# EAGLE board 4.17 build (EAGLE 7.2.0)
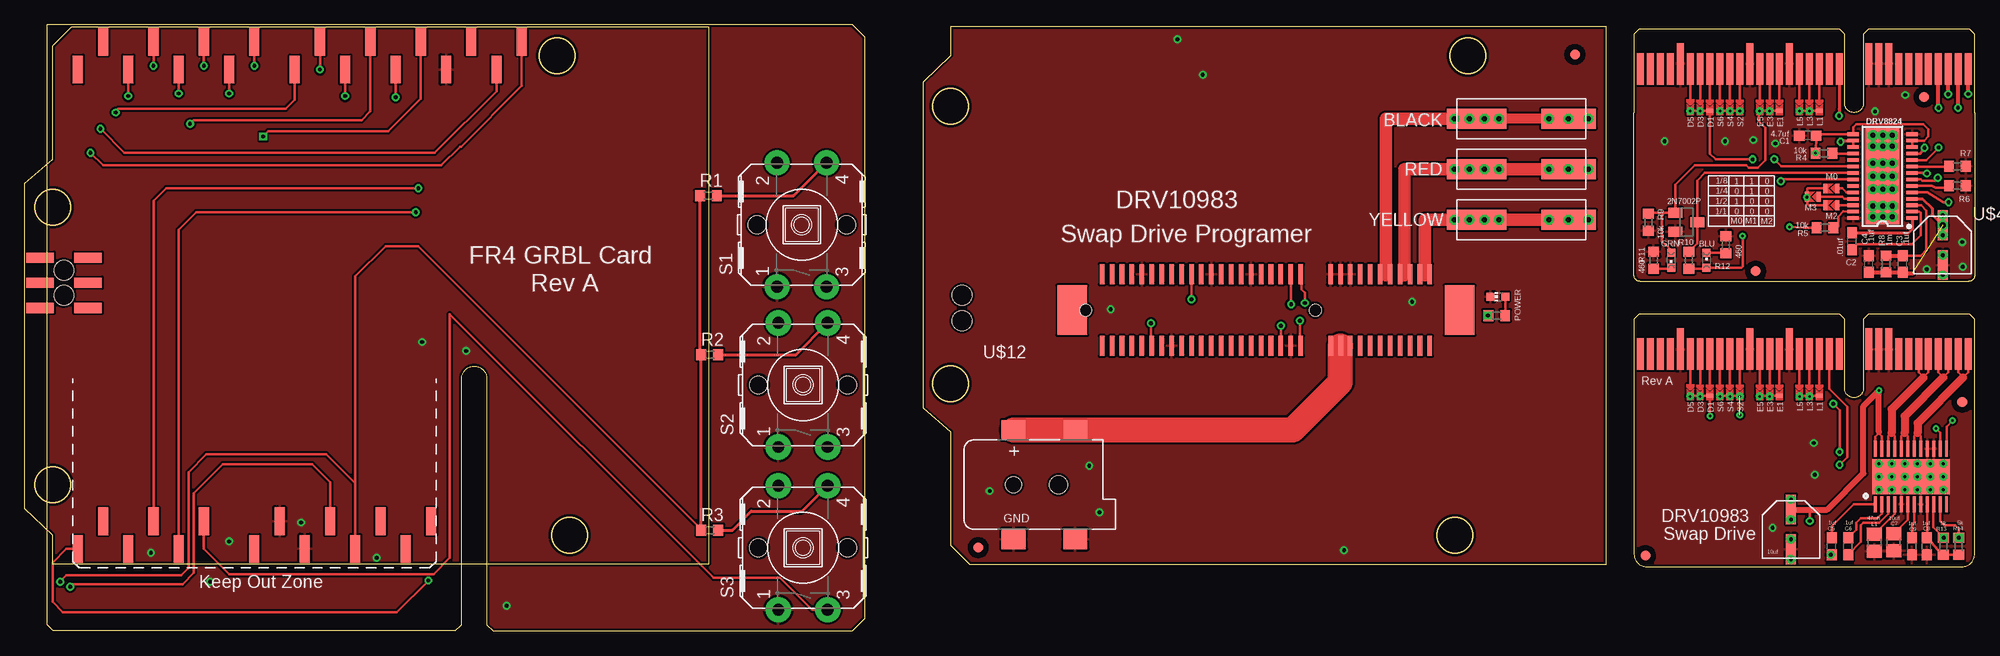
[diagram p0: board, top side]
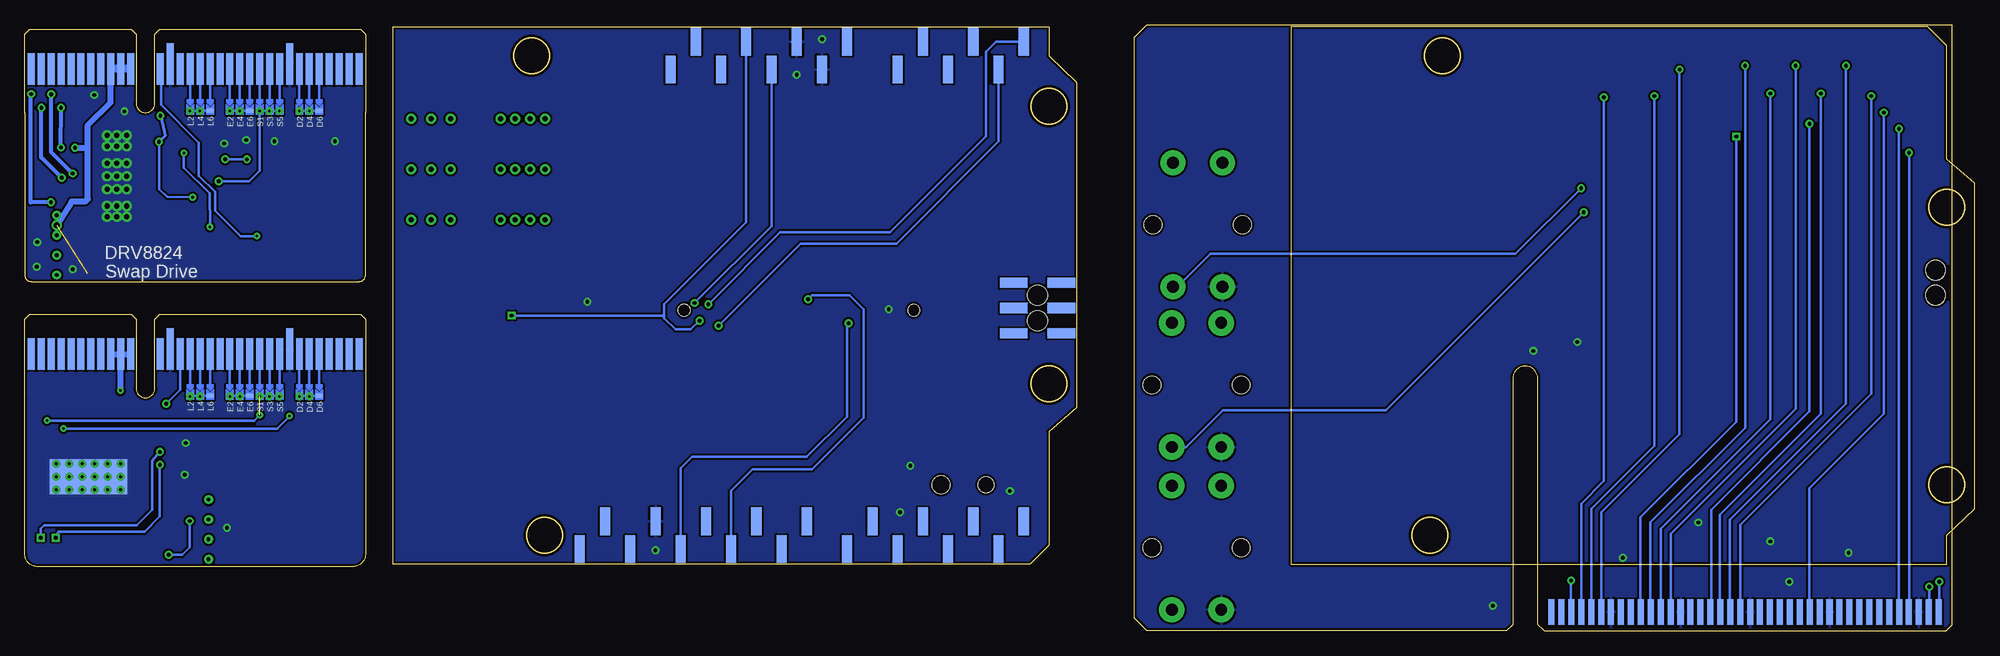
[diagram p1: board, bottom side, seen from below]

Size 196.34 x 61.02 mm. Coordinates in mm from the lower left corner, seen from the top.
Outline: 196.34,52.18 196.34,35.81 arc-90 195.71,35.18 162.68,35.18 arc-90 162.04,35.81 162.04,52.18
Outline: 162.04,23.48 162.04,7.75 arc90 163.31,6.48 195.07,6.48 arc90 196.34,7.75 196.34,23.48
Copper layers (1*16): Top 0.035mm / dielectric 1.5mm / Bottom 0.035mm
Design rules "default *": minimum track width 10mil, minimum drill 24mil, track to track 8mil, track to pad 8mil, pad to pad 8mil, via to via 8mil, smd to smd 8mil, copper to edge 10mil, drill to drill 8mil, minimum pad ring 10mil, minimum via ring 8mil, stop-mask expansion 4mil, vias tented up to drill 0mil, thermal gap 10mil

## Footprints (pad centres in the part's own frame; a part is rotated, then mirrored left to right if it is on the bottom)
SOT23 = smd 1 x 1.4: 1 -0.95,-1.1; 2 0.95,-1.1; 3 0,1.1
104188-0110 = smd 5.5 x 2: 1@1 0,0 | smd 6 x 2: 1@2 9.25,0 | drill 0.5: 1@3 -2,0; 1@4 0,0; 1@5 2,0; 1@6 7,0; 1@7 8.5,0; 1@9 10,0; 1@10 11.5,0
CHIPLED_0603 = smd 0.8 x 0.8: A 0,-0.75; C 0,0.75
C0603 = smd 1.1 x 1: 1 -0.85,0; 2 0.85,0
C0805 = smd 1.3 x 1.5: 1 -0.85,0; 2 0.85,0
DCJACK_2MM_SMT = smd 2.4 x 2: GND 0,-5.5; GNDBREAK 6.2,-5.5; PWR1 0,5.5; PWR2 6.2,5.5 | hole 1.6: 0,0 | hole 1.8: 4.5,0
HTSSOP-28 = smd 0.36 x 1.19: 1 -4.225,-2.97; 2 -3.575,-2.97; 3 -2.925,-2.97; 4 -2.275,-2.97; 5 -1.625,-2.97; 6 -0.975,-2.97; 7 -0.325,-2.97; 8 0.325,-2.97; 9 0.975,-2.97; 10 1.625,-2.97; 11 2.275,-2.97; 12 2.925,-2.97; 13 3.575,-2.97; 14 4.225,-2.97; 15 4.225,2.97; 16 3.575,2.97; 17 2.925,2.97; 18 2.275,2.97; 19 1.625,2.97; 20 0.975,2.97; 21 0.325,2.97; 22 -0.325,2.97; 23 -0.975,2.97; 24 -1.625,2.97; 25 -2.275,2.97; 26 -2.925,2.97; 27 -3.575,2.97; 28 -4.225,2.97 | drill 0.508: GND@10 -4.1,1; GND@11 -4.1,0; GND@12 -4.1,-1; GND@13 -3,-1; GND@14 -3,0; GND@15 -3,1; GND@16 -1.3,1; GND@17 -1.3,0; GND@18 -1.3,-1; GND@19 0,-1; GND@20 0,0; GND@21 0,1; GND@22 1.3,1; GND@23 1.3,0; GND@24 1.3,-1; GND@25 3,-1; GND@26 3,0; GND@27 3,1; GND@28 4.1,1; GND@29 4.1,0; GND@30 4.1,-1 | smd 9.7 x 3.4: GND@PAD 0,0
SELECTIVE_CONNECT = smd 0.4 x 1: P$1 0,0; P$2 1.2,0
ARDUINOR3_ICSP_SMT = smd 1.016 x 2.794 bottom: 3V 35.56,1.143; 5V 38.1,3.937; A0 50.8,3.937; A1 53.34,1.143; A2 55.88,3.937; A3 58.42,1.143; A4 60.96,3.937; A5 63.5,1.143; AREF 23.876,52.197; D0 63.5,49.403; D1 60.96,52.197; D2 58.42,49.403; D3 55.88,52.197; D4 53.34,49.403; D5 50.8,52.197; D6 48.26,49.403; D7 45.72,52.197; D8 41.656,49.403; D9 39.116,52.197; D10 36.576,49.403; D11 34.036,52.197; D12 31.496,49.403; D13 28.956,52.197; GND 26.416,49.403; GND@1 43.18,3.937; GND@2 40.64,1.143; IOREF 30.48,1.143; RESERVED 27.94,3.937; RESET 33.02,3.937; SCL 18.796,52.197; SDA 21.336,49.403; VIN 45.72,1.143 | smd 2.794 x 1.016 bottom: 5V_ICSP 67.31,30.48; GND@3 67.31,25.4; MISO 62.484,30.48; MOSI 67.31,27.94; RESET_ICSP 62.484,25.4; SCK 62.484,27.94 | hole 2: 64.897,29.21; 64.897,26.67
CHIP-LED0603 = smd 0.8 x 0.8: A 0,-0.75; C 0,0.75
R0603 = smd 1 x 1.1: 1 -0.85,0; 2 0.85,0
B3F-40XX-ROUND = drill 1.194 pad 2.54: 1 -6.248,2.489; 2 6.248,2.489; 3 -6.248,-2.489; 4 6.248,-2.489 | hole 1.803: 0,-4.496; 0,4.496
FR4_CARD_EDGE = smd 0.61 x 2.54 bottom: P$1 -19.5,1.91; P$2 -18.5,1.91; P$3 -17.5,1.91; P$4 -16.5,1.91; P$5 -15.5,1.91; P$6 -14.5,1.91; P$7 -13.5,1.91; P$8 -12.5,1.91; P$9 -11.5,1.91; P$10 -10.5,1.91; P$11 -9.5,1.91; P$12 -8.5,1.91; P$13 -7.5,1.91; P$14 -6.5,1.91; P$15 -5.5,1.91; P$16 -4.5,1.91; P$17 -3.5,1.91; P$18 -2.5,1.91; P$19 -1.5,1.91; P$20 -0.5,1.91; P$21 0.5,1.91; P$22 1.5,1.91; P$23 2.5,1.91; P$24 3.5,1.91; P$25 4.5,1.91; P$26 5.5,1.91; P$27 6.5,1.91; P$28 7.5,1.91; P$29 8.5,1.91; P$30 9.5,1.91; P$31 10.5,1.91; P$32 11.5,1.91; P$33 12.5,1.91; P$34 13.5,1.91; P$35 14.5,1.91; P$36 15.5,1.91; P$37 16.5,1.91; P$38 17.5,1.91; P$39 18.5,1.91; P$40 19.5,1.91
PCIE_64_SMART_BOARD = smd 0.7 x 4.2: GND@1 8.65,3.5; GND@2 9.65,3.5; GND@3 10.65,3.5; P$49 18.65,3.5; P$53 22.65,3.5; P$60 29.65,3.5 | smd 0.7 x 3.2 bottom: P$1 0.65,4; P$2 1.65,4; P$3 2.65,4; P$4 3.65,4; P$5 4.65,4; P$6 5.65,4; P$7 6.65,4; P$8 7.65,4; P$9 8.65,4; P$10 9.65,4; P$11 10.65,4; P$12 13.65,4; P$14 15.65,4; P$15 16.65,4; P$16 17.65,4; P$17 18.65,4; P$18 19.65,4; P$19 20.65,4; P$20 21.65,4; P$21 22.65,4; P$22 23.65,4; P$23 24.65,4; P$24 25.65,4; P$26 27.65,4; P$27 28.65,4; P$28 29.65,4; P$29 30.65,4; P$30 31.65,4; P$31 32.65,4; P$32 33.65,4 | smd 0.7 x 4.2 bottom: P$13 14.65,3.5; P$25 26.65,3.5 | smd 0.7 x 0.4 bottom: P$15@1 16.65,8.2; P$16@1 17.65,8.2; P$17@1 18.65,8.2; P$19@1 20.65,8.2; P$20@1 21.65,8.2; P$21@1 22.65,8.2; P$22@1 23.65,8.2; P$23@1 24.65,8.2; P$24@1 25.65,8.2; P$26@1 27.65,8.2; P$27@1 28.65,8.2; P$28@1 29.65,8.2 | smd 0.7 x 3.2: P$33 0.65,4; P$34 1.65,4; P$35 2.65,4; P$36 3.65,4; P$37 4.65,4; P$38 5.65,4; P$39 6.65,4; P$40 7.65,4; P$44 13.65,4; P$45 14.65,4; P$46 15.65,4; P$47 16.65,4; P$48 17.65,4; P$50 19.65,4; P$51 20.65,4; P$52 21.65,4; P$54 23.65,4; P$55 24.65,4; P$56 25.65,4; P$57 26.65,4; P$58 27.65,4; P$59 28.65,4; P$61 30.65,4; P$62 31.65,4; P$63 32.65,4; P$64 33.65,4 | drill 0.254 pad 0.305: P$41 21.65,8.25; P$42 17.65,8.25; P$43 16.65,8.25; P$65 20.65,8.25; P$66 23.65,8.25; P$67 24.65,8.25; P$68 27.65,8.25; P$69 28.65,8.25; P$70 25.65,8.25 | smd 0.7 x 0.4: P$46@1 15.65,8.2; P$47@1 16.65,8.2; P$48@1 17.65,8.2; P$50@1 19.65,8.2; P$51@1 20.65,8.2; P$52@1 21.65,8.2; P$54@1 23.65,8.2; P$55@1 24.65,8.2; P$56@1 25.65,8.2; P$57@1 26.65,8.2; P$58@1 27.65,8.2; P$59@1 28.65,8.2
EEEFK0J220R = smd 1 x 3: P$1 0,2; P$2 0,-2 | drill 0.381: P$3 0,1; P$5 0,3; P$6 0,-1; P$8 0,-3
FIDUCIAL_1MM = smd 1 x 1: 1 0,0
HTSS0P-24 = smd 7.8 x 3.5 bottom: GND 0,0 | smd 7.8 x 3.5: GND@1 0,0 | drill 0.3: GND@3 -3.25,1.3; GND@4 -1.95,1.3; GND@5 -0.65,1.3; GND@6 0.65,1.3; GND@7 1.95,1.3; GND@8 3.25,1.3; GND@9 3.25,0; GND@10 1.95,0; GND@11 0.65,0; GND@12 -0.65,0; GND@13 -1.95,0; GND@14 -3.25,0; GND@15 -3.25,-1.3; GND@16 -1.95,-1.3; GND@17 -0.65,-1.3; GND@18 0.65,-1.3; GND@19 1.95,-1.3; GND@20 3.25,-1.3 | smd 0.3 x 1.6: P$1 -3.575,-2.8; P$2 -2.925,-2.8; P$3 -2.275,-2.8; P$4 -1.625,-2.8; P$5 -0.975,-2.8; P$6 -0.325,-2.8; P$7 0.325,-2.8; P$8 0.975,-2.8; P$9 1.625,-2.8; P$10 2.275,-2.8; P$11 2.925,-2.8; P$12 3.575,-2.8; P$13 3.575,2.8; P$14 2.925,2.8; P$15 2.275,2.8; P$16 1.625,2.8; P$17 0.975,2.8; P$18 0.325,2.8; P$19 -0.325,2.8; P$20 -0.975,2.8; P$21 -1.625,2.8; P$22 -2.275,2.8; P$23 -2.925,2.8; P$24 -3.575,2.8
10076266-100CLF = smd 0.457 x 2.032: P$1 0,0; P$2 1,0; P$3 2,0; P$4 3,0; P$5 4,0; P$6 5,0; P$7 6,0; P$8 7,0; P$9 8,0; P$10 9,0; P$11 10,0; P$12 13,0; P$13 14,0; P$14 15,0; P$15 16,0; P$16 17,0; P$17 18,0; P$18 19,0; P$19 20,0; P$20 21,0; P$21 22,0; P$22 23,0; P$23 24,0; P$24 25,0; P$25 26,0; P$26 27,0; P$27 28,0; P$28 29,0; P$29 30,0; P$30 31,0; P$31 32,0; P$32 33,0; P$33 0,-7.2; P$34 1,-7.2; P$35 2,-7.2; P$36 3,-7.2; P$37 4,-7.2; P$38 5,-7.2; P$39 6,-7.2; P$40 7,-7.2; P$41 8,-7.2; P$42 9,-7.2; P$43 10,-7.2; P$44 13,-7.2; P$45 14,-7.2; P$46 15,-7.2; P$47 16,-7.2; P$48 17,-7.2; P$49 18,-7.2; P$50 19,-7.2; P$51 20,-7.2; P$52 21,-7.2; P$53 22,-7.2; P$54 23,-7.2; P$55 24,-7.2; P$56 25,-7.2; P$57 26,-7.2; P$58 27,-7.2; P$59 28,-7.2; P$60 29,-7.2; P$61 30,-7.2; P$62 31,-7.2; P$63 32,-7.2; P$64 33,-7.2 | smd 3 x 5: SOLDER-NAIL@1 -3,-3.6; SOLDER-NAIL@2 36,-3.6 | hole 1.2: 11.5,-3.6; 34.65,-3.6

## Placement (x,y rotation side)
2N7002P  [SOT23]  167.31,41.14 270 top
BLACK  104188-0110  [104188-0110]  155.45,51.56 180 top
BLU  [CHIPLED_0603]  169.34,37.33 0 top
C1  4.7uf  [C0603]  179.52,49.87 180 top
C2  .01uf  [C0603]  183.99,39.22 90 top
C3  .1uf  [C0603]  189.1,36.94 90 top
C4  .1uf  [C0603]  185.69,36.94 90 top
C5  .1uf  [C0603]  181.94,8.52 90 top
C6  .1uf  [C0603]  183.6,8.52 90 top
C7  10uf  [C0805]  188.19,8.92 90 top
C8  1uf  [C0603]  191.5,8.52 90 top
C9  1uf  [C0603]  190.03,8.52 90 top
CN1  [DCJACK_2MM_SMT]  99.57,14.73 0 top
DRV8824  DRV8824  [HTSSOP-28]  187.07,45.78 90 top
GRN  [CHIPLED_0603]  165.79,37.33 180 top
L1  47uh  [C0805]  186.23,8.89 270 top
M0  SELECTIVE_CONNECT  [SELECTIVE_CONNECT]  182.51,44.54 180 top
M1  ARDUINO_R3_ICSPSMT  [ARDUINOR3_ICSP_SMT]  68.83,7.11 0 bottom
M2  SELECTIVE_CONNECT  [SELECTIVE_CONNECT]  182.5,42.86 180 top
M3  SELECTIVE_CONNECT  [SELECTIVE_CONNECT]  180.64,43.7 180 top
M4  ARDUINO_R3_ICSPSMT  [ARDUINOR3_ICSP_SMT]  159.26,60.45 180 top
POWER  [CHIP-LED0603]  148.34,33.66 90 top
R1  5k  [R0603]  68.83,43.82 0 top
R2  5k  [R0603]  68.96,27.81 0 top
R3  5k  [R0603]  68.96,10.16 0 top
R4  10k  [R0603]  181.17,48.08 180 top
R5  10k  [R0603]  181.27,40.58 180 top
R6  [R0603]  194.61,44.83 180 top
R7  [R0603]  194.61,46.8 180 top
R8  1m  [R0603]  187.41,36.94 90 top
R9  10k  [R0603]  163.5,41.14 90 top
R10  5k  [R0603]  167.56,37.33 270 top
R11  460  [R0603]  164.01,37.33 90 top
R12  460  [R0603]  171.27,38.87 90 top
R13  5k  [R0603]  193.19,8.53 90 top
R14  5k  [R0603]  194.74,8.53 90 top
R15  460  [R0603]  148.21,31.75 0 top
RED  104188-0110  [104188-0110]  155.45,46.48 180 top
S1  [B3F-40XX-ROUND]  78.23,40.89 90 top
S2  [B3F-40XX-ROUND]  78.36,24.77 90 top
S3  [B3F-40XX-ROUND]  78.36,8.38 90 top
U$1  FR4_CARD_EDGE  [FR4_CARD_EDGE]  23.11,0 0 top
U$2  [PCIE_64_SMART_BOARD]  196.34,60.58 180 top
U$3  [STEP_DIAGRAM]  176.15,45.85 180 top
U$4  EEEFK0J220R  [EEEFK0J220R]  193.12,38.84 0 top
U$5  FIDUCIAL  [FIDUCIAL_1MM]  191.24,53.75 180 top
U$6  FIDUCIAL  [FIDUCIAL_1MM]  174.29,36.22 180 top
U$7  [PCIE_64_SMART_BOARD]  196.34,31.88 180 top
U$8  DRV10983  [HTSS0P-24]  189.93,15.54 0 top
U$9  10uf  [EEEFK0J220R]  177.84,10.23 0 top
U$10  FIDUCIAL  [FIDUCIAL_1MM]  163.19,7.58 180 top
U$11  FIDUCIAL  [FIDUCIAL_1MM]  195.09,23.03 180 top
U$12  10061913-101CLF  [10076266-100CLF]  141.48,28.7 180 top
U$13  FIDUCIAL  [FIDUCIAL_1MM]  156.08,58.04 180 top
U$14  FIDUCIAL  [FIDUCIAL_1MM]  96.01,8.38 180 top
YELLOW  104188-0110  [104188-0110]  155.45,41.4 180 top

## Library data of the parts
2N7002P BLU C1-C9 CN1 GRN L1 M1 M4 POWER R1-R15 S1-S3 U$5 U$6 U$10 U$11 U$13 U$14 = adafruit
BLACK DRV8824 M0 M2 M3 RED U$1-U$4 U$7-U$9 U$12 YELLOW = PocketNC

## Nets
3.3V: C1.1 DRV8824.12 DRV8824.13 DRV8824.15 R4.2 R5.2
3V: M1.3V R1.1 R2.1 R3.1 U$1.P$1
3V1: BLU.A R10.2 U$2.P$12
3V2: M4.3V R15.1 U$12.P$12
5V: M1.5V U$1.P$2
5V1: DRV8824.16 DRV8824.17 M0.P$2 M2.P$2 M3.P$2 U$2.P$44
5V2: M4.5V U$12.P$44
A1: DRV8824.5 U$2.P$33
A2: DRV8824.7 U$2.P$34
B1: DRV8824.10 U$2.P$36
B2: DRV8824.8 U$2.P$35
B3: U$12.P$1
B4: U$12.P$2
B5: U$12.P$3
B6: U$12.P$4
B7: U$12.P$5
DIR: DRV8824.20 U$2.P$57@1
DIR1: U$7.P$57@1 U$8.P$14
DIR2: M4.D13 U$12.P$27
DIR_X: M1.D5 U$1.P$28
DIR_Y: M1.D6 U$1.P$29
DIR_Z: M1.D7 U$1.P$30
ENBL: M1.D8 U$1.P$14
ENBL-IN: 2N7002P.1 GRN.A R9.2 U$2.P$50@1
ENBL-OUT: 2N7002P.3 DRV8824.21 R10.1
FEED_HOLD: M1.A1 S2.3
GND: M1.GND M1.GND@1 M1.GND@2 S1.1 S2.1 S3.1 U$1.P$3 U$1.P$12 U$1.P$20 U$1.P$27 U$1.P$34
GND1: 2N7002P.2 C1.2 C4.2 DRV8824.14 DRV8824.28 DRV8824.GND@10 DRV8824.GND@11 DRV8824.GND@12 DRV8824.GND@13 DRV8824.GND@14 DRV8824.GND@15 DRV8824.GND@16 DRV8824.GND@17 DRV8824.GND@18 DRV8824.GND@19 DRV8824.GND@20 DRV8824.GND@21 DRV8824.GND@22 DRV8824.GND@23 DRV8824.GND@24 DRV8824.GND@25 DRV8824.GND@26 DRV8824.GND@27 DRV8824.GND@28 DRV8824.GND@29 DRV8824.GND@30 DRV8824.GND@PAD R6.1 R7.1 R9.1 R11.2 R12.2 U$2.GND@1 U$2.GND@2 U$2.GND@3 U$2.P$13 U$2.P$25 U$2.P$49 U$2.P$53 U$2.P$60 U$4.P$2
GND2: C7.1 C8.1 C9.1 L1.2 U$7.GND@1 U$7.GND@2 U$7.GND@3 U$7.P$13 U$7.P$25 U$7.P$49 U$7.P$53 U$7.P$60 U$8.GND U$8.GND@1 U$8.GND@3 U$8.GND@4 U$8.GND@5 U$8.GND@6 U$8.GND@7 U$8.GND@8 U$8.GND@9 U$8.GND@10 U$8.GND@11 U$8.GND@12 U$8.GND@13 U$8.GND@14 U$8.GND@15 U$8.GND@16 U$8.GND@17 U$8.GND@18 U$8.GND@19 U$8.GND@20 U$8.P$5 U$8.P$8 U$8.P$15 U$8.P$16 U$9.P$2
GND3: CN1.GND CN1.GNDBREAK M4.GND M4.GND@1 M4.GND@2 POWER.C U$12.P$13 U$12.P$25 U$12.P$41 U$12.P$42 U$12.P$43 U$12.P$49 U$12.P$53 U$12.P$60
LIM_X: M1.D9 U$1.P$35
LIM_Y: M1.D10 U$1.P$36
LIM_Z: M1.D12 U$1.P$37
N$1: C2.2 DRV8824.1
N$2: R1.2 S1.4
N$3: C2.1 DRV8824.2
N$4: DRV8824.9 R7.2
N$5: R2.2 S2.4
N$6: DRV8824.6 R6.2
N$7: DRV8824.18 R4.1
N$8: R3.2 S3.4
N$9: BLU.C R12.1
N$10: GRN.C R11.1
N$11: C5.2 U$8.P$1
N$12: C6.2 U$8.P$2
N$13: C6.1 U$8.P$3
N$14: C7.2 U$8.P$6
N$15: L1.1 U$8.P$4
N$16: DRV8824.27 R5.1
N$17: DRV8824.26 M2.P$1
N$18: DRV8824.25 M3.P$1
N$19: DRV8824.24 M0.P$1
N$20: C9.2 U$8.P$7
N$21: POWER.A R15.2
PROBE: M1.A5 U$1.P$38
PWM: U$7.P$22@1 U$8.P$13
PWM1: M4.D11 U$12.P$55
RESET/ABORT: M1.A0 S3.3
SCL: M1.SCL U$1.P$4
SCL1: R13.2 U$7.P$45 U$8.P$10
SCL2: M4.A5 U$12.P$45
SDA: M1.SDA U$1.P$5
SDA1: R14.2 U$7.P$14 U$8.P$11
SDA2: M4.A4 U$12.P$14
SP_DIR: M1.D13 U$1.P$31
SP_PWM: M1.D11 U$1.P$24
START/RESUME: M1.A2 S1.3
STEP: DRV8824.22 U$2.P$22@1
STEP_X: M1.D2 U$1.P$21
STEP_Y: M1.D3 U$1.P$22
STEP_Z: M1.D4 U$1.P$23
U: U$7.P$33 U$7.P$34 U$8.P$17 U$8.P$18
U1: U$12.P$33 U$12.P$34 YELLOW.1@1
V: U$7.P$35 U$7.P$36 U$8.P$19 U$8.P$20
V1: RED.1@1 U$12.P$35 U$12.P$36
V3P3: C8.2 R13.1 R14.1 U$8.P$9
VCC: C3.1 C4.1 DRV8824.4 DRV8824.11 R8.1 U$2.P$9 U$2.P$10 U$2.P$11 U$4.P$1
VCC1: C5.1 U$7.P$9 U$7.P$10 U$7.P$11 U$8.P$23 U$8.P$24 U$9.P$1
VCC2: CN1.PWR1 U$12.P$9 U$12.P$10 U$12.P$11
VCP: C3.2 DRV8824.3 R8.2
VIN: M1.VIN
VIN1: M4.VIN
W: U$7.P$37 U$7.P$38 U$8.P$21 U$8.P$22
W1: BLACK.1@1 U$12.P$37 U$12.P$38

## Tracks (layer width: path | path; a pad name or v marks a point on that pad's centre or on a via)
3.3V  (via drill 0.25 pad 0.25)  (1 unrouted)
  Top 0.254: 180.37,48.13 C1.1 180.44,50.01 DRV8824.15 184.1,50.71 184.42,51.03 191.17,51.03 191.68,50.52 191.68,49.8 191.24,49.36 DRV8824.13 DRV8824.12 | R5.2 179.13,40.58 v177.7,40.69 | v180.34,48.13 180.34,48.06 R4.2
  Bottom 0.254: v177.7,40.69 177.72,44.04 180.34,46.63 v180.34,48.13
3V  (via drill 0.38)
  Top 0.254: R3.1 68.11,10.25 39.62,38.73 36.32,38.73 33.27,35.69 M1.3V 33.27,14.86 30.35,17.78 18.29,17.78 16.51,16 16.51,6.35 15.75,5.59 4.19,5.59 v3.56,4.95
  Top 0.305: R3.1 R2.1 67.98,27.81 R1.1
  Bottom 0.254: v3.56,4.95 3.56,1.97 U$1.P$1
3V1  (via drill 0.25 pad 0.25)
  Top 0.254: R10.2 169.24,36.48 BLU.A 172.85,36.58 172.97,36.7 v172.97,39.75
  Bottom 0.254: v172.97,39.75 174.62,39.75 177.17,42.29 177.17,44.2 178.82,45.85 178.82,49.15 182.63,52.96 182.63,56.51 U$2.P$12
3V2  (via drill 0.38 pad 0.38)
  Top 0.254: v128.4,31.24 128.4,28.78 U$12.P$12 | R15.1 v147.32,31.75
  Bottom 0.254: M4.3V 123.7,41.15 131.95,32.89 131.95,31.88 | 131.95,31.88 131.95,31.5 130.81,30.35 129.29,30.35 v128.4,31.24 | v147.32,31.75 132.08,31.75 131.95,31.88
5V  (via drill 0.38)
  Top 0.254: M1.5V 30.73,14.99 28.96,16.76 19.94,16.76 17.02,13.84 17.02,5.84 15.88,4.7 4.83,4.7 v4.57,4.45
  Bottom 0.254: v4.57,4.45 4.57,1.95 U$1.P$2
5V1  (via drill 0.25, 0.38)
  Top 0.254: DRV8824.17 DRV8824.16 | M2.P$2 179.66,42.83 179.46,43.03 179.46,43.7 M3.P$2 | M0.P$2 179.53,44.54 179.49,44.5 179.49,43.8 M3.P$2 | v179.44,43.66 179.23,43.68 M3.P$2
  Top 0.305: U$2.P$44 182.69,52.55 v182.68,51.85 | v182.83,49.24 183.1,49.24 183.21,49.35 DRV8824.16
  Bottom 0.254: v182.83,49.24 182.83,44.49 182.03,43.69 v179.44,43.66
  Bottom 0.305: v182.68,51.85 182.22,49.85 v182.83,49.24
5V2  (via drill 0.38 pad 0.38)
  Top 0.254: v128.91,33.02 128.91,34.04 128.52,34.42 128.52,35.86 U$12.P$44
  Bottom 0.254: M4.5V 121.16,40.77 v128.91,33.02
A1  (via drill 0.38 pad 0.3)
  Top 0.254: DRV8824.5 191.59,44.16 193.17,43.16 v193.71,43.16
  Top 0.406: v195.69,54.06 U$2.P$33
  Bottom 0.406: v193.71,43.16 195.77,43.16 195.75,54.01 v195.69,54.06
A2  (via drill 0.38)
  Top 0.254: DRV8824.7 190.93,45.46 191.06,45.33 192.33,45.33 v192.62,45.62
  Top 0.406: v194.67,52.67 194.67,56.55 U$2.P$34
  Bottom 0.406: v192.62,45.62 v192.63,45.62 194.69,47.68 v194.67,52.67
B1  (via drill 0.38 pad 0.3)
  Top 0.254: DRV8824.10 191.45,47.41 v192.71,48.67
  Top 0.406: v192.7,52.68 U$2.P$36
  Bottom 0.406: v192.71,48.67 192.68,52.67 v192.7,52.68
B2  (via drill 0.38)
  Top 0.254: DRV8824.8 191.2,46.11 v191.53,46.05
  Top 0.406: v193.69,54.03 U$2.P$35
  Bottom 0.406: v191.53,46.05 193.7,48.2 193.68,54.01 v193.69,54.03
DIR  (via drill 0.38 pad 0.3)
  Top 0.254: v176.17,47.48 176.89,46.79 184.07,46.79 DRV8824.20 | v173.98,47.47 170.28,47.48 169.7,48.06 169.7,50.41 169.69,51.45 U$2.P$57@1
  Bottom 0.254: v176.17,47.48 176.25,47.48 v173.98,47.47
DIR1  (via drill 0.25)
  Top 0.254: U$8.P$14 192.86,19.96 v192.44,20.38 | v169.69,21.63 U$7.P$57@1
  Bottom 0.254: v192.44,20.38 170.94,20.38 v169.69,21.63
DIR2  (via drill 0.38 pad 0.38)
  Top 0.254: v113.41,30.99 113.41,28.77 U$12.P$27
  Bottom 0.254: M4.D13 130.3,16.38 129.16,17.53 117.6,17.53 113.54,21.59 113.54,30.86 v113.41,30.99
DIR_X  (via drill 0.38)
  Top 0.254: M1.D5 v18.03,56.9
  Bottom 0.254: v18.03,56.9 18.03,22.35 30.61,9.78 U$1.P$28
DIR_Y  (via drill 0.38)
  Top 0.254: M1.D6 v20.57,54.1
  Bottom 0.254: v20.57,54.1 20.57,21.34 31.62,10.29 U$1.P$29
DIR_Z  (via drill 0.38)
  Top 0.254: M1.D7 v23.11,56.9
  Bottom 0.254: v23.11,56.9 23.11,20.45 32.64,10.92 32.64,1.94 U$1.P$30
ENBL  (via drill 0.38)
  Top 0.254: M1.D8 27.18,53.47 26.29,52.58 9.4,52.58 v9.14,52.2
  Bottom 0.254: v9.14,52.2 9.14,21.84 16.64,14.35 16.64,1.93 U$1.P$14
ENBL-IN
  Top 0.254: 165.1,42.09 2N7002P.1 166.21,44.93 168.15,46.86 173.36,46.86 173.61,46.61 174.5,46.61 175.26,47.37 175.26,50.67 174.62,51.31 174.62,52.36 174.64,52.38 | 165.1,42.09 163.6,42.09 R9.2 | GRN.A 165.79,38.3 164.85,39.24 164.85,41.83 165.1,42.09
ENBL-OUT
  Top 0.254: R10.1 168.41,39.02 2N7002P.3 168.4,41.14 168.4,45.34 169.17,46.11 DRV8824.21
FEED_HOLD  (via drill 0.38)
  Top 0.254: v39.37,42.16 17.27,42.16 15.49,40.39 M1.A1
  Bottom 0.254: S2.3 79.4,18.52 75.69,22.22 59.31,22.22 v39.37,42.16
GND  (via drill 0.38)
  other vias: 48.51,2.54 35.43,7.37 27.81,10.92 18.67,4.95 20.57,9.02 12.7,7.87 44.45,28.19 40.01,29.08
  pour Top: 0.25,60.96 85.34,60.96 85.34,0 0.25,0
  pour Bottom: 0.25,60.96 85.34,60.96 85.34,0 0.25,0
GND1  (via drill 0.38)
  other vias: 165.12,49.3 189.36,53.96 171.2,49.3 174.05,49.43 186.3,52.3 176.26,49.07 195.15,36.66 195.1,39.15 191.52,36.4
  pour Bottom: 196.41,35.18 161.84,35.09 161.89,58.52 196.46,58.6
  pour Top: 196.42,35.17 161.82,35.1 161.9,58.51 196.41,58.63
GND2  (via drill 0.38)
  other vias: 175.99,10.38 180.14,18.93 180.24,15.73
  pour Top: 196.33,6.39 196.33,28.88 162.1,28.88 162.1,6.39
  pour Bottom: 196.33,6.39 196.33,28.88 162.1,28.88 162.1,6.39
GND3  (via drill 0.38)
  other vias: 116.08,59.56 139.7,33.15 109.35,32.38 97.16,14.1 107.19,16.64 108.2,11.94 118.62,56.01 132.84,8.13
  pour Top: 159.51,6.6 90.17,6.35 90.17,60.96 159.51,61.21
  pour Bottom: 159.51,6.6 90.17,6.35 90.17,60.96 159.51,61.21
LIM_X  (via drill 0.38)
  Top 0.254: M1.D9 v29.72,56.52
  Bottom 0.254: v29.72,56.52 29.72,19.81 37.59,11.94 37.59,1.93 U$1.P$35
LIM_Y  (via drill 0.38)
  Top 0.254: M1.D10 v32.26,53.85
  Bottom 0.254: v32.26,53.85 32.26,18.67 38.61,12.32 U$1.P$36
LIM_Z  (via drill 0.38)
  Top 0.254: M1.D12 v37.34,53.72
  Bottom 0.254: v37.34,53.72 37.34,15.11 39.62,12.83 U$1.P$37
N$1
  Top 0.305: DRV8824.1 190.04,40.43 189.64,40.03 184.04,40.03 C2.2
N$2
  Top 0.305: R1.2 77.39,43.82 S1.4
N$3
  Top 0.254: DRV8824.2 190.79,42.21 190.91,42.09 190.91,39.85 189.99,38.94 184.56,38.94 C2.1
N$4
  Top 0.254: DRV8824.9 193.45,46.76 R7.2
N$5
  Top 0.305: R2.2 77.65,27.81 S2.4
N$6
  Top 0.254: 193.42,44.81 R6.2 193.24,44.6 192.43,44.6 192,44.81 DRV8824.6
N$7
  Top 0.254: DRV8824.18 182.04,48.06 R4.1
N$8
  Top 0.305: R3.2 71.25,10.16 73.15,12.06 78.28,12.06 S3.4
N$9
  Top 0.254: BLU.C 171.22,38.08 R12.1
N$10
  Top 0.254: R11.1 165.69,36.48 GRN.C
N$11
  Top 0.254: C5.2 181.94,10.53 184.19,12.78 186.32,12.78 U$8.P$1
N$12
  Top 0.254: C6.2 184.44,10.21 184.44,10.88 184.89,11.33 186.54,11.33 187.01,11.79 U$8.P$2
N$13
  Top 0.254: C6.1 184.89,8.96 184.89,10.63 185.14,10.88 186.74,10.88 187.66,11.79 U$8.P$3
N$14
  Top 0.254: C7.2 189.61,11.18 U$8.P$6
N$15
  Top 0.254: L1.1 188.31,11.81 U$8.P$4
N$16
  Top 0.254: DRV8824.27 183.12,42.23 182.6,41.71 182.6,40.73 R5.1
N$17
  Top 0.254: DRV8824.26 182.17,42.86 M2.P$1
N$18
  Top 0.254: DRV8824.25 183.21,43.51 183.02,43.7 M3.P$1
N$19
  Top 0.254: DRV8824.24 183.41,44.16 183.01,44.56 182.16,44.56 M0.P$1
N$20
  Top 0.254: U$8.P$7 190.26,10.99 190.04,10.78 C9.2
N$21
  Top 0.254: POWER.A 149.09,31.78 R15.2
PROBE  (via drill 0.38)
  Top 0.254: M1.A5 4.19,8.25 2.79,6.86 2.79,2.92 3.81,1.91 37.47,1.91 v40.64,5.08
  Bottom 0.254: v40.64,5.08 40.64,1.94 U$1.P$38
PWM  (via drill 0.25)  (1 unrouted)
  Top 0.254: U$8.P$13 193.51,20.56 v194.09,21.18
  Bottom 0.254: v194.09,21.18 173.24,21.18 v172.69,21.73
PWM1  (via drill 0.38 pad 0.38)
  Top 0.254: v117.48,33.4 U$12.P$55
  Bottom 0.254: M4.D11 125.22,14.1 123.06,16.26 117.09,16.26 111.89,21.46 111.89,32.38 113.28,33.78 117.09,33.78 v117.48,33.4
RESET/ABORT
  Top 0.254: S3.3 79.27,2.13 76.07,5.33 69.34,5.33 42.8,31.88 42.8,7.37 41.15,5.71 20.57,5.71 18.03,8.25 M1.A0
SCL  (via drill 0.38)
  Top 0.254: M1.SCL 50.04,54.86 43.94,48.77 43.82,48.77 41.91,46.86 7.87,46.86 v6.6,48.13
  Bottom 0.254: v6.6,48.13 U$1.P$4
SCL1  (via drill 0.38)
  Top 0.254: R13.2 193.26,9.44 193.26,9.36 v193.24,9.38 192.19,10.43 192.19,12.72 U$8.P$10 | v182.74,16.73 183.49,17.48 183.49,22.58 181.69,24.38 U$7.P$45
  Bottom 0.254: v193.24,9.38 193.24,9.68 192.94,9.98 184.29,9.98 182.74,11.53 v182.74,16.73
SCL2  (via drill 0.38 pad 0.38)
  Top 0.254: v127.51,32.89 127.51,35.87 U$12.P$45
  Bottom 0.254: M4.A5 98.55,59.31 99.57,58.29 99.57,49.78 109.22,40.13 120.27,40.13 v127.51,32.89
SDA  (via drill 0.38)
  Top 0.254: M1.SDA 47.5,54.36 41.28,48.13 10.03,48.13 v7.62,50.55
  Bottom 0.254: v7.62,50.55 U$1.P$5
SDA1  (via drill 0.38)
  Top 0.254: 194.74,9.58 R14.2 194.74,10.28 194.39,10.63 193.29,10.63 192.86,11.06 U$8.P$11 | v182.74,18.03 182.74,22.23 v182.09,22.88
  Bottom 0.254: R14.2 194.74,10.28 194.39,10.63 185.09,10.63 183.49,12.23 183.49,17.13 v182.74,18.03 | v182.09,22.88 180.69,24.28 U$7.P$14
  other vias: 194.74,9.38
SDA2  (via drill 0.38 pad 0.38)
  Top 0.254: v126.49,30.73 126.49,28.72 U$12.P$14
  Bottom 0.254: M4.A4 98.3,49.28 108.59,38.99 118.24,38.99 v126.49,30.73
SP_DIR  (via drill 0.38)
  Top 0.254: M1.D13 39.88,53.59 36.58,50.29 24.51,50.29 v24,49.78
  Bottom 0.254: v24,49.78 24,21.08 33.66,11.43 33.66,1.95 U$1.P$31
SP_PWM  (via drill 0.38)
  Top 0.254: M1.D11 34.8,52.32 33.91,51.44 17.02,51.44 v16.64,51.05
  Bottom 0.254: v16.64,51.05 16.64,22.1 26.54,12.19 26.54,1.98 U$1.P$24
START/RESUME  (via drill 0.38)
  Top 0.254: v39.62,44.58 14.22,44.58 12.95,43.31 M1.A2
  Bottom 0.254: S1.3 80.29,34.65 76.96,37.97 46.23,37.97 v39.62,44.58
STEP  (via drill 0.38 pad 0.3)
  Top 0.254: DRV8824.22 177.07,45.46 v176.82,45.28
  Bottom 0.254: v176.82,45.28 173.75,45.28 172.68,46.34 172.68,50.04 172.69,51.24 U$2.P$22@1 172.68,54.27
STEP_X  (via drill 0.38)
  Top 0.254: M1.D2 v10.41,53.85
  Bottom 0.254: v10.41,53.85 10.41,23.88 23.62,10.67 U$1.P$21
STEP_Y  (via drill 0.38)
  Top 0.254: M1.D3 v12.95,56.9
  Bottom 0.254: v12.95,56.9 12.95,22.86 24.64,11.18 24.64,1.93 U$1.P$22
STEP_Z  (via drill 0.38)
  Top 0.254: M1.D4 v15.49,54.1
  Bottom 0.254: v15.49,54.1 15.49,21.84 25.65,11.68 25.65,1.95 U$1.P$23
U
  Top 0.254: U$7.P$34 194.69,26.03 195.19,25.53 195.69,26.03 U$7.P$33 | U$8.P$18 190.26,19.59 190.59,19.93 190.91,19.61 U$8.P$17
  Top 0.813: 195.19,25.53 190.59,20.93 190.59,19.93
U1
  Top 0.254: U$12.P$33 140.97,35.9 | U$12.P$34 140.97,35.9 | 140.97,35.9 140.97,35.94
  Top 1.27: YELLOW.1@1 140.97,41.4 140.97,35.94 140.97,35.81
V
  Top 0.254: U$7.P$36 192.69,26.03 193.19,25.53 193.69,26.03 U$7.P$35 | U$8.P$20 188.96,19.59 189.29,19.93 189.61,19.61 U$8.P$19
  Top 0.813: 193.19,25.53 189.29,21.63 189.29,19.93
V1
  Top 0.254: U$12.P$35 U$12.P$36 138.94,35.9 138.94,35.81
  Top 1.27: RED.1@1 138.94,46.48 138.94,35.81
V3P3
  Top 0.254: R14.1 R13.1 193.04,7.83 192.64,8.18 191.95,8.92 C8.2 191.56,9.42 U$8.P$9
VCC  (via drill 0.38, 0.6 pad 0.25)  (1 unrouted)
  Top 0.254: DRV8824.11 190.86,48.06 v191.29,48.64
  Top 0.305: DRV8824.4 191.08,43.51 192.06,42.53 192.06,41.9 U$4.P$1
  Top 0.406: 190.07,35.99 189.1,35.99 C3.1 R8.1 C4.1
  Top 0.61: U$4.P$1
  Bottom 0.61: 190.02,48.83 189.99,43.48 190.26,43.22 191.63,43.22 U$4.P$1 | 190.02,48.83 189.99,50.91 187.71,53.2 187.71,56.57 U$2.P$9 | v191.29,48.64 190.19,48.65 190.02,48.83
  Bottom 0.813: U$2.P$11 U$2.P$10 U$2.P$9
  other vias: 193.12,40.84
VCC1  (via drill 0.25, 0.38)
  Top 0.254: 186.69,19.91 186.69,20.05 | U$8.P$24 186.36,19.57 186.69,19.91 | U$8.P$23 187.01,19.59 186.69,19.91 | C5.1 181.85,7.67 v181.84,7.68 | v179.74,11.08 179.74,12.23
  Top 0.61: 186.69,20.05 v186.69,24.19 185.14,22.64 185.14,15.88 181.49,12.23 179.74,12.23 U$9.P$1
  Bottom 0.254: v181.84,7.68 180.49,7.68 179.74,8.43 v179.74,11.08
  Bottom 0.61: v186.69,24.19 U$7.P$10 | U$7.P$9 U$7.P$10 | U$7.P$10 U$7.P$11
VCC2
  Top 0.254: U$12.P$9 U$12.P$10 U$12.P$11
  Top 2.54: CN1.PWR1 127.67,20.23 132.46,25.02 132.46,28.68 U$12.P$10
VCP
  Top 0.254: DRV8824.3 190.95,42.86 191.49,42.32 191.49,38.35 190.93,37.79 C3.2
  Top 0.406: R8.2 C3.2
W
  Top 0.254: U$7.P$38 190.69,26.03 191.19,25.53 191.69,26.03 U$7.P$37 | U$8.P$22 187.66,19.59 187.99,19.93 188.31,19.61 U$8.P$21
  Top 0.813: 191.19,25.53 187.99,22.33 187.99,19.93
W1
  Top 0.254: U$12.P$37 137.03,35.9 U$12.P$38
  Top 1.27: 145.95,51.56 137.03,51.56 137.03,35.9 137.03,35.81

## Text on the board
tNames: DRV10983 | Swap Drive Programer | FR4 GRBL Card | Rev A | Rev A | DRV10983 | Swap Drive
bNames: DRV8824 | Swap Drive